# EAGLE board both (EAGLE 9.6.2)
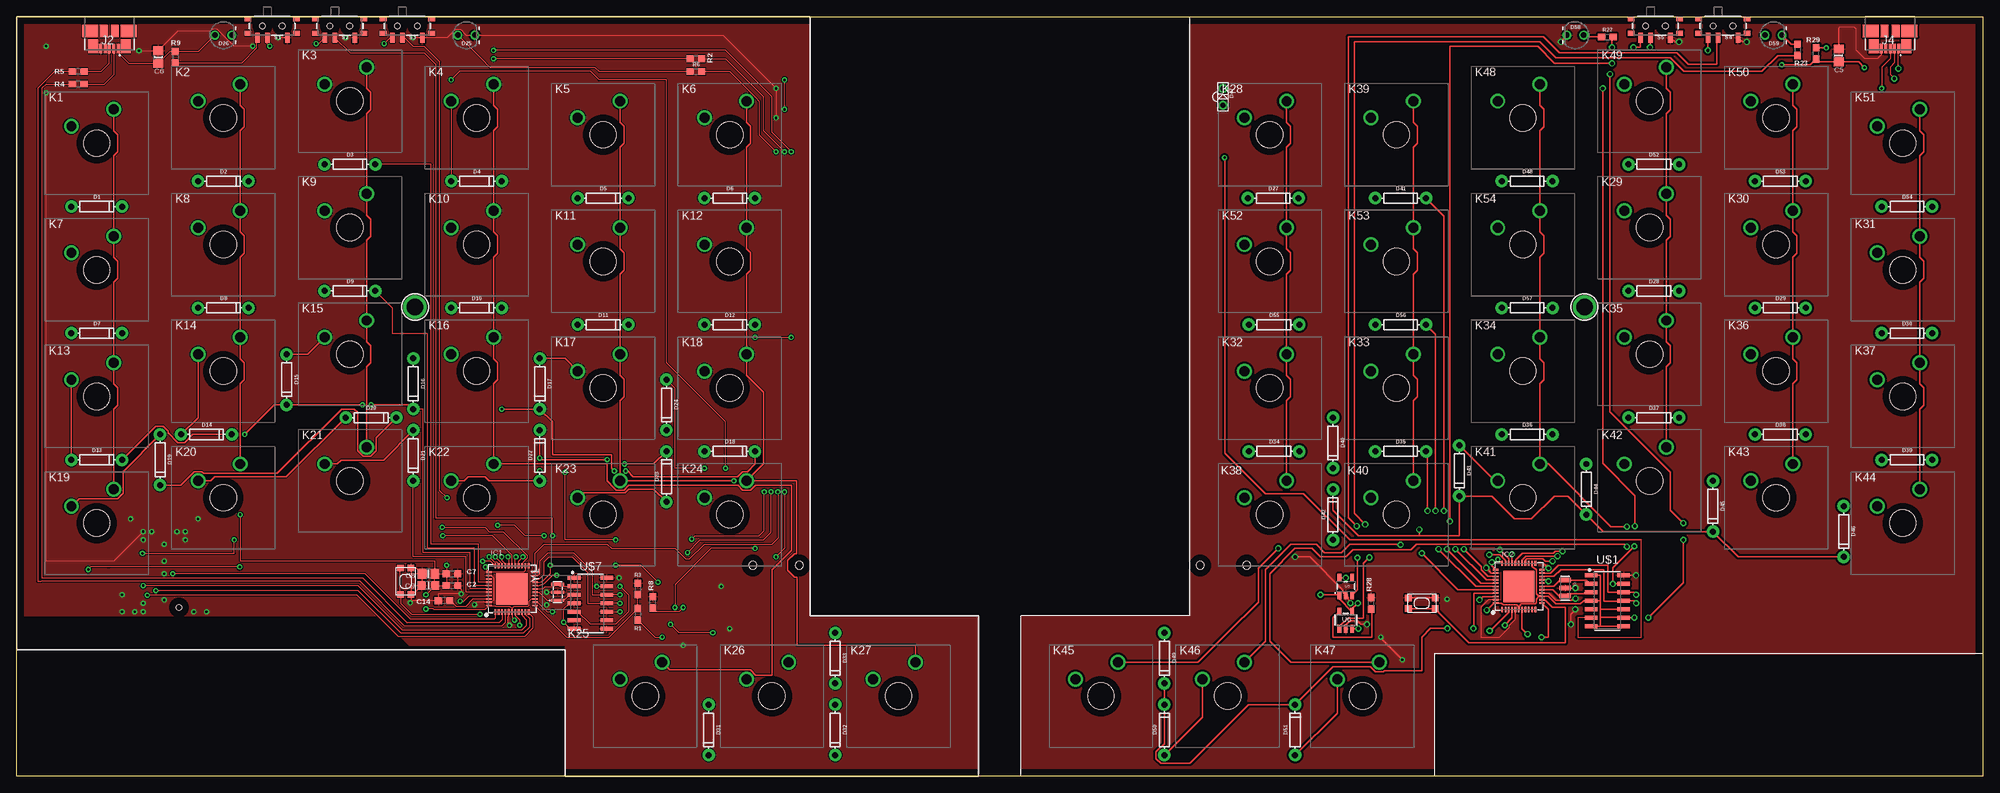
[diagram p0: board, top side]
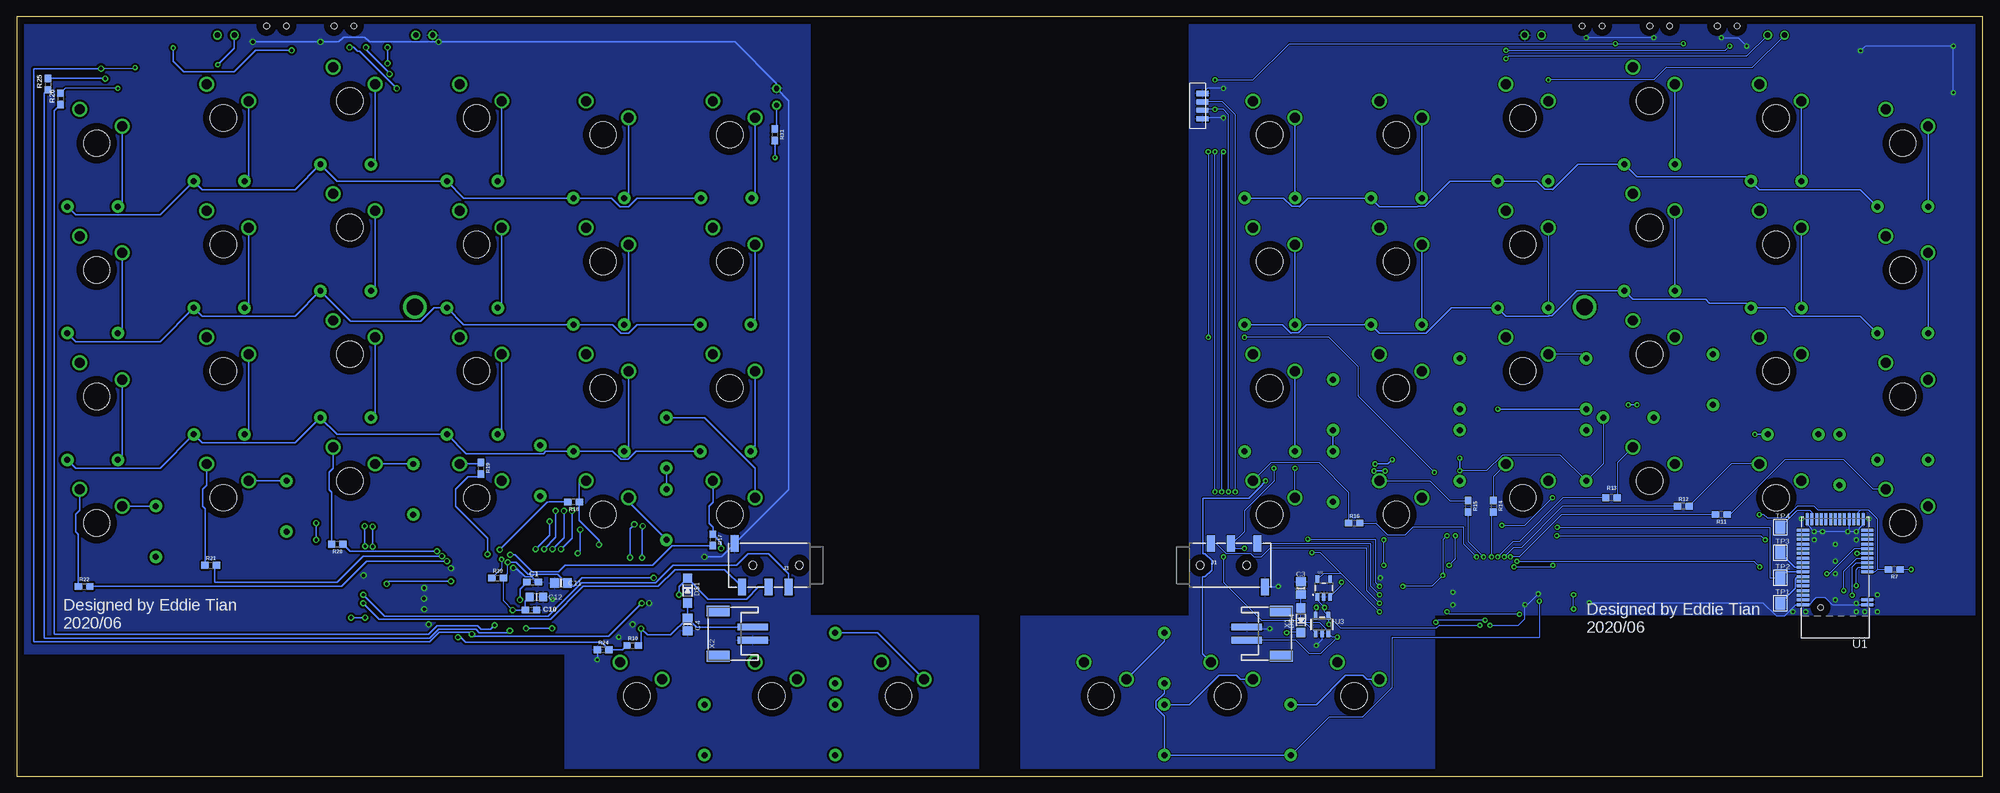
[diagram p1: board, bottom side, seen from below]

Size 295.91 x 114.3 mm. Coordinates in mm from the lower left corner, seen from the top.
Outline: 0,114.3 295.91,114.3 295.91,0 0,0 0,114.3
Copper layers (1*16): Top 0.035mm / dielectric 1.5mm / Bottom 0.035mm
Design rules "default": minimum track width 6mil, minimum drill 0.35mm, track to track 6mil, track to pad 6mil, pad to pad 6mil, via to via 6mil, smd to smd 6mil, copper to edge 40mil, drill to drill 6mil, minimum pad ring 10mil, minimum via ring 8mil, stop-mask expansion 4mil, vias tented up to drill 0mil, thermal gap 10mil

## Footprints (pad centres in the part's own frame; a part is rotated, then mirrored left to right if it is on the bottom)
0603-NO = smd 1.1 x 1: 1 -0.85,0; 2 0.85,0
0805-NO = smd 1.3 x 1.5: 1 -0.95,0; 2 0.95,0
_0805MP = smd 1.2 x 1.3: 1 -1.016,0; 2 1.016,0
DIODE-1N4148 = drill 0.9 pad 1.88: A -3.81,0; C 3.81,0
LED_3MM-NS = drill 0.813: A -1.27,0; K 1.27,0
LTE-302 = drill 0.8: A 1.27,0; C -1.27,0
SOD-123 = smd 1.4 x 1.4: A 1.85,0; C -1.85,0
TQFN44_7MM = smd 0.25 x 0.8: 1 -2.5,-3.475; 2 -2,-3.475; 3 -1.5,-3.475; 4 -1,-3.475; 5 -0.5,-3.475; 6 0,-3.475; 7 0.5,-3.475; 8 1,-3.475; 9 1.5,-3.475; 10 2,-3.475; 11 2.5,-3.475; 23 2.5,3.475; 24 2,3.475; 25 1.5,3.475; 26 1,3.475; 27 0.5,3.475; 28 0,3.475; 29 -0.5,3.475; 30 -1,3.475; 31 -1.5,3.475; 32 -2,3.475; 33 -2.5,3.475 | smd 0.8 x 0.25: 12 3.475,-2.5; 13 3.475,-2; 14 3.475,-1.5; 15 3.475,-1; 16 3.475,-0.5; 17 3.475,0; 18 3.475,0.5; 19 3.475,1; 20 3.475,1.5; 21 3.475,2; 22 3.475,2.5; 34 -3.475,2.5; 35 -3.475,2; 36 -3.475,1.5; 37 -3.475,1; 38 -3.475,0.5; 39 -3.475,0; 40 -3.475,-0.5; 41 -3.475,-1; 42 -3.475,-1.5; 43 -3.475,-2; 44 -3.475,-2.5 | smd 4.7 x 4.7: THERMAL 0,0
AUDIO_JACK_3.5MM_TRRS_SMD_RA = smd 1.2 x 2.5: EARTH 11.3,-3.25; RING1 6.2,3.25; RING2 3.2,3.25; TIP 10.2,3.25 | hole 1.2: 1.6,0; 8.6,0
47346-0001 = smd 0.45 x 1.38: 1 1.3,-4.81; 2 0.65,-4.81; 3 0,-4.81; 4 -0.65,-4.81; 5 -1.3,-4.81 | smd 1.475 x 2.1: 6 -2.453,-4.45; 7 2.453,-4.45 | smd 1.175 x 1.9: 8 0.838,-2.15; 9 -0.838,-2.15 | smd 2.375 x 1.9: 10 2.913,-2.15; 11 -2.913,-2.15
MXSWITCHPLATE = drill 1.499: P$1 -3.81,2.54; P$2 2.54,5.08 | hole 3.988: 0,0
0603 = smd 1.1 x 1: 1 -0.85,0; 2 0.85,0
SWITCH_SPST_SMD_A = smd 0.7 x 1.5: 1 -2.25,-1.75; 2 -0.75,-1.75; 3 2.25,-1.75 | smd 1 x 0.6: GND1 -3.65,1; GND3 3.65,1 | smd 1 x 0.8: GND2 -3.65,-1.1; GND4 3.65,-1.1 | hole 0.9: -1.5,0; 1.5,0
KMR2 = smd 1 x 1: 1 2,0.8; 2 2,-0.8; 3 -2,0.8; 4 -2,-0.8
PAD-1.5X2.0 = smd 1.5 x 2: P$1 0,0
BLE_MODULE_RAYTAC_MDBT40 = smd 1.85 x 0.45: 1 -4.825,4; 2 -4.825,3.3; 3 -4.825,-0.9; 4 -4.825,-1.6; 5 -4.825,-2.3; 6 -4.825,-3; 7 -4.825,-3.7; 8 -4.825,-4.4; 9 -4.825,-5.1; 10 -4.825,-5.8; 11 -4.825,-6.5; 12 -4.825,-7.2; 26 4.825,-7.2; 27 4.825,-6.5; 28 4.825,-5.8; 29 4.825,-5.1; 30 4.825,-4.4; 31 4.825,-3.7; 32 4.825,-3; 33 4.825,-2.3; 34 4.825,-1.6; 35 4.825,-0.9; 36 4.825,-0.2; 37 4.825,0.5; 38 4.825,1.2; 39 4.825,1.9; 40 4.825,2.6; 41 4.825,3.3; 42 4.825,4 | smd 0.45 x 1.85: 13 -4.2,-8.825; 14 -3.5,-8.825; 15 -2.8,-8.825; 16 -2.1,-8.825; 17 -1.4,-8.825; 18 -0.7,-8.825; 19 0,-8.825; 20 0.7,-8.825; 21 1.4,-8.825; 22 2.1,-8.825; 23 2.8,-8.825; 24 3.5,-8.825; 25 4.2,-8.825 | hole 0.9: 2.2,4.45
SOT23-5 = smd 0.55 x 1.2: 1 -0.95,-1.3; 2 0,-1.3; 3 0.95,-1.3; 4 0.95,1.3; 5 -0.95,1.3
TSOP75456 = smd 0.8 x 1.8: $GND 1.905,-0.762; GND -1.905,-0.762; OUT 0.635,-0.762; VCC -0.635,-0.762
SOIC127P600X175-14N = smd 1.901 x 0.599: 1 -2.455,3.81; 2 -2.455,2.54; 3 -2.455,1.27; 4 -2.455,0; 5 -2.455,-1.27; 6 -2.455,-2.54; 7 -2.455,-3.81; 8 2.455,-3.81; 9 2.455,-2.54; 10 2.455,-1.27; 11 2.455,0; 12 2.455,1.27; 13 2.455,2.54; 14 2.455,3.81
MOUNTINGHOLE_2.5_PLATED = drill 2.5 pad 3.2: P$1 0,0
JSTPH2 = smd 1 x 4.6: 1 -1,-3.7; 2 1,-3.7 | smd 1.6 x 3.4: NC1 -3.4,1.5; NC2 3.4,1.5
CSTNE10M0G55Z000R0 = smd 0.4 x 1.9: 1 1.2,0; 2 0,0; 3 -1.2,0
RESONATOR-SMD = smd 0.7 x 1.7: 1 -1.2,0; 2 0,0; 3 1.2,0

## Placement (x,y rotation side)
C1  1uF  [0603-NO]  218.25,29.21 0 bottom
C2  1uF  [0603-NO]  65.53,28.7 0 top
C3  10µF  [0805-NO]  102.62,28.32 90 bottom
C4  10µF  [0805-NO]  194.95,22.86 270 bottom
C5  10µF  [0805-NO]  274.19,108.46 90 top
C6  10µF  [0805-NO]  21.34,108.2 90 top
C7  1uF  [0603-NO]  65.53,30.48 0 top
C8  10µF  [0805-NO]  61.98,30.48 180 top
C9  10uF  [_0805MP]  61.98,28.7 180 top
C10  1uF  [0603-NO]  218.5,25.02 0 bottom
C11  10µF  [0805-NO]  214,29.08 180 bottom
C12  10uF  [_0805MP]  217.68,26.99 0 bottom
C14  1uF  [0603-NO]  64.33,26.42 180 top
D1  200mA/100V/1V  [DIODE-1N4148]  12.06,85.72 0 top
D2  200mA/100V/1V  [DIODE-1N4148]  31.12,89.54 0 top
D3  200mA/100V/1V  [DIODE-1N4148]  50.17,92.08 0 top
D4  200mA/100V/1V  [DIODE-1N4148]  69.22,89.54 0 top
D5  200mA/100V/1V  [DIODE-1N4148]  88.27,87 0 top
D6  200mA/100V/1V  [DIODE-1N4148]  107.32,87 0 top
D7  200mA/100V/1V  [DIODE-1N4148]  12.06,66.67 0 top
D8  200mA/100V/1V  [DIODE-1N4148]  31.12,70.48 0 top
D9  200mA/100V/1V  [DIODE-1N4148]  50.17,73.03 0 top
D10  200mA/100V/1V  [DIODE-1N4148]  69.22,70.48 0 top
D11  200mA/100V/1V  [DIODE-1N4148]  88.27,67.95 0 top
D12  200mA/100V/1V  [DIODE-1N4148]  107.32,67.95 0 top
D13  200mA/100V/1V  [DIODE-1N4148]  12.06,47.62 0 top
D14  200mA/100V/1V  [DIODE-1N4148]  28.58,51.44 0 top
D15  200mA/100V/1V  [DIODE-1N4148]  40.64,59.69 270 top
D16  200mA/100V/1V  [DIODE-1N4148]  59.69,59.06 270 top
D17  200mA/100V/1V  [DIODE-1N4148]  78.74,59.06 270 top
D18  200mA/100V/1V  [DIODE-1N4148]  107.32,48.89 0 top
D19  200mA/100V/1V  [DIODE-1N4148]  21.59,47.62 270 top
D20  200mA/100V/1V  [DIODE-1N4148]  53.34,53.98 0 top
D21  200mA/100V/1V  [DIODE-1N4148]  59.69,48.26 270 top
D22  200mA/100V/1V  [DIODE-1N4148]  78.74,48.26 90 top
D23  200mA/100V/1V  [DIODE-1N4148]  97.79,45.09 90 top
D24  200mA/100V/1V  [DIODE-1N4148]  97.79,55.88 270 top
D25  [LED_3MM-NS]  67.69,111.51 0 top
D26  [LED_3MM-NS]  31.12,111.51 0 top
D27  200mA/100V/1V  [DIODE-1N4148]  189.1,87 0 top
D28  200mA/100V/1V  [DIODE-1N4148]  246.38,73.03 0 top
D29  200mA/100V/1V  [DIODE-1N4148]  265.43,70.48 0 top
D30  200mA/100V/1V  [DIODE-1N4148]  284.48,66.67 0 top
D31  200mA/100V/1V  [DIODE-1N4148]  104.14,6.98 270 top
D32  200mA/100V/1V  [DIODE-1N4148]  123.19,6.98 270 top
D33  200mA/100V/1V  [DIODE-1N4148]  123.19,17.78 270 top
D34  200mA/100V/1V  [DIODE-1N4148]  189.23,48.89 0 top
D35  200mA/100V/1V  [DIODE-1N4148]  208.28,48.89 0 top
D36  200mA/100V/1V  [DIODE-1N4148]  227.33,51.44 0 top
D37  200mA/100V/1V  [DIODE-1N4148]  246.38,53.98 0 top
D38  200mA/100V/1V  [DIODE-1N4148]  265.43,51.44 0 top
D39  200mA/100V/1V  [DIODE-1N4148]  284.48,47.62 0 top
D40  200mA/100V/1V  [DIODE-1N4148]  198.12,50.17 270 top
D41  200mA/100V/1V  [DIODE-1N4148]  208.28,87 0 top
D42  200mA/100V/1V  [DIODE-1N4148]  198.12,39.37 90 top
D43  200mA/100V/1V  [DIODE-1N4148]  217.11,45.97 270 top
D44  200mA/100V/1V  [DIODE-1N4148]  236.22,43.18 270 top
D45  200mA/100V/1V  [DIODE-1N4148]  255.27,40.64 270 top
D46  200mA/100V/1V  [DIODE-1N4148]  274.96,36.83 270 top
D47  LED-IRSIDE_EMITTER  [LTE-302]  181.55,102.23 270 top
D48  200mA/100V/1V  [DIODE-1N4148]  227.33,89.54 0 top
D49  200mA/100V/1V  [DIODE-1N4148]  172.72,17.78 270 top
D50  200mA/100V/1V  [DIODE-1N4148]  172.72,6.98 90 top
D51  200mA/100V/1V  [DIODE-1N4148]  192.41,6.98 90 top
D52  200mA/100V/1V  [DIODE-1N4148]  246.38,92.08 0 top
D53  200mA/100V/1V  [DIODE-1N4148]  265.43,89.54 0 top
D54  200mA/100V/1V  [DIODE-1N4148]  284.48,85.72 0 top
D55  200mA/100V/1V  [DIODE-1N4148]  189.23,67.95 0 top
D56  200mA/100V/1V  [DIODE-1N4148]  208.28,67.95 0 top
D57  200mA/100V/1V  [DIODE-1N4148]  227.33,70.48 0 top
D58  [LED_3MM-NS]  234.57,111.51 180 top
D59  [LED_3MM-NS]  264.41,111.51 0 top
D$1  MBR120  [SOD-123]  194.95,27.94 270 bottom
D$4  MBR120  [SOD-123]  102.62,23.5 90 bottom
IC1  ATMEGA32U4-MU  [TQFN44_7MM]  74.55,28.19 0 top
IC2  ATMEGA32U4-MU  [TQFN44_7MM]  226.06,28.58 0 top
J1  AUDIO_JACK_TRRSSMD_RA  [AUDIO_JACK_3.5MM_TRRS_SMD_RA]  119.38,31.75 0 bottom
J2  47346-0001  [47346-0001]  13.97,114.3 0 top
J3  AUDIO_JACK_TRRSSMD_RA  [AUDIO_JACK_3.5MM_TRRS_SMD_RA]  176.53,31.75 180 bottom
J4  47346-0001  [47346-0001]  281.94,114.3 0 top
K1  MXSWITCHPLATE  [MXSWITCHPLATE]  12.06,95.25 0 top
K2  MXSWITCHPLATE  [MXSWITCHPLATE]  31.12,99.06 0 top
K3  MXSWITCHPLATE  [MXSWITCHPLATE]  50.17,101.6 0 top
K4  MXSWITCHPLATE  [MXSWITCHPLATE]  69.22,99.06 0 top
K5  MXSWITCHPLATE  [MXSWITCHPLATE]  88.27,96.52 0 top
K6  MXSWITCHPLATE  [MXSWITCHPLATE]  107.32,96.52 0 top
K7  MXSWITCHPLATE  [MXSWITCHPLATE]  12.06,76.2 0 top
K8  MXSWITCHPLATE  [MXSWITCHPLATE]  31.12,80.01 0 top
K9  MXSWITCHPLATE  [MXSWITCHPLATE]  50.17,82.55 0 top
K10  MXSWITCHPLATE  [MXSWITCHPLATE]  69.22,80.01 0 top
K11  MXSWITCHPLATE  [MXSWITCHPLATE]  88.27,77.47 0 top
K12  MXSWITCHPLATE  [MXSWITCHPLATE]  107.32,77.47 0 top
K13  MXSWITCHPLATE  [MXSWITCHPLATE]  12.06,57.15 0 top
K14  MXSWITCHPLATE  [MXSWITCHPLATE]  31.12,60.96 0 top
K15  MXSWITCHPLATE  [MXSWITCHPLATE]  50.17,63.5 0 top
K16  MXSWITCHPLATE  [MXSWITCHPLATE]  69.22,60.96 0 top
K17  MXSWITCHPLATE  [MXSWITCHPLATE]  88.27,58.42 0 top
K18  MXSWITCHPLATE  [MXSWITCHPLATE]  107.32,58.42 0 top
K19  MXSWITCHPLATE  [MXSWITCHPLATE]  12.06,38.1 0 top
K20  MXSWITCHPLATE  [MXSWITCHPLATE]  31.12,41.91 0 top
K21  MXSWITCHPLATE  [MXSWITCHPLATE]  50.17,44.45 0 top
K22  MXSWITCHPLATE  [MXSWITCHPLATE]  69.22,41.91 0 top
K23  MXSWITCHPLATE  [MXSWITCHPLATE]  88.27,39.37 0 top
K24  MXSWITCHPLATE  [MXSWITCHPLATE]  107.32,39.37 0 top
K25  MXSWITCHPLATE  [MXSWITCHPLATE]  94.62,12.07 0 top
K26  MXSWITCHPLATE  [MXSWITCHPLATE]  113.67,12.07 0 top
K27  MXSWITCHPLATE  [MXSWITCHPLATE]  132.72,12.07 0 top
K28  MXSWITCHPLATE  [MXSWITCHPLATE]  188.6,96.52 0 top
K29  MXSWITCHPLATE  [MXSWITCHPLATE]  245.75,82.55 0 top
K30  MXSWITCHPLATE  [MXSWITCHPLATE]  264.8,80.01 0 top
K31  MXSWITCHPLATE  [MXSWITCHPLATE]  283.85,76.2 0 top
K32  MXSWITCHPLATE  [MXSWITCHPLATE]  188.6,58.42 0 top
K33  MXSWITCHPLATE  [MXSWITCHPLATE]  207.65,58.42 0 top
K34  MXSWITCHPLATE  [MXSWITCHPLATE]  226.69,60.96 0 top
K35  MXSWITCHPLATE  [MXSWITCHPLATE]  245.75,63.5 0 top
K36  MXSWITCHPLATE  [MXSWITCHPLATE]  264.8,60.96 0 top
K37  MXSWITCHPLATE  [MXSWITCHPLATE]  283.85,57.15 0 top
K38  MXSWITCHPLATE  [MXSWITCHPLATE]  188.6,39.37 0 top
K39  MXSWITCHPLATE  [MXSWITCHPLATE]  207.65,96.52 0 top
K40  MXSWITCHPLATE  [MXSWITCHPLATE]  207.65,39.37 0 top
K41  MXSWITCHPLATE  [MXSWITCHPLATE]  226.69,41.91 0 top
K42  MXSWITCHPLATE  [MXSWITCHPLATE]  245.75,44.45 0 top
K43  MXSWITCHPLATE  [MXSWITCHPLATE]  264.8,41.91 0 top
K44  MXSWITCHPLATE  [MXSWITCHPLATE]  283.85,38.1 0 top
K45  MXSWITCHPLATE  [MXSWITCHPLATE]  163.2,12.07 0 top
K46  MXSWITCHPLATE  [MXSWITCHPLATE]  182.25,12.07 0 top
K47  MXSWITCHPLATE  [MXSWITCHPLATE]  202.56,12.07 0 top
K48  MXSWITCHPLATE  [MXSWITCHPLATE]  226.69,99.06 0 top
K49  MXSWITCHPLATE  [MXSWITCHPLATE]  245.75,101.6 0 top
K50  MXSWITCHPLATE  [MXSWITCHPLATE]  264.8,99.06 0 top
K51  MXSWITCHPLATE  [MXSWITCHPLATE]  283.85,95.25 0 top
K52  MXSWITCHPLATE  [MXSWITCHPLATE]  188.6,77.47 0 top
K53  MXSWITCHPLATE  [MXSWITCHPLATE]  207.65,77.47 0 top
K54  MXSWITCHPLATE  [MXSWITCHPLATE]  226.69,80.01 0 top
R1  100k  [0603]  93.47,24.38 270 top
R2  1K  [0603-NO]  102.24,107.95 0 top
R3  100k  [0603]  93.47,28.19 270 top
R4  22  [0603-NO]  9.27,104.14 180 top
R5  22  [0603-NO]  9.27,106.05 180 top
R6  2.2k  [0603]  102.24,106.05 0 top
R7  100k  [0603]  13.34,31.12 180 bottom
R8  10K\  [0603-NO]  95.76,26.16 90 top
R9  100K  [0603-NO]  23.88,108.2 270 top
R10  100k  [0603]  203.2,19.69 0 bottom
R11  100k  [0603]  39.37,39.37 180 bottom
R12  100k  [0603]  45.09,40.64 180 bottom
R13  100k  [0603]  55.88,41.91 180 bottom
R14  100k  [0603]  73.66,40.64 270 bottom
R15  100k  [0603]  77.47,40.64 270 bottom
R16  100k  [0603]  94.62,38.1 0 bottom
R17  100k  [0603]  191.14,35.56 270 bottom
R18  100k  [0603]  212.09,41.28 180 bottom
R19  100k  [0603]  226.06,46.36 270 bottom
R20  100k  [0603]  247.65,34.92 0 bottom
R21  100k  [0603]  266.7,31.75 0 bottom
R22  100k  [0603]  285.75,28.58 0 bottom
R23  1K  [0603-NO]  268.03,109.28 270 top
R24  100k  [0603]  207.65,19.05 0 bottom
R25  22  [0603-NO]  291.21,104.14 270 bottom
R26  22  [0603-NO]  289.31,101.92 270 bottom
R27  2.2k  [0603]  239.4,111.25 0 top
R28  10K\  [0603-NO]  203.84,26.04 90 top
R29  100K  [0603-NO]  270.83,108.78 90 top
R30  100k  [0603]  223.52,29.84 0 bottom
R31  470  [0603]  181.8,96.52 270 bottom
S1  Power  [SWITCH_SPST_SMD_A]  38.48,112.9 0 top
S2  bt_mode  [SWITCH_SPST_SMD_A]  48.64,112.9 0 top
S3  irmode  [SWITCH_SPST_SMD_A]  58.8,112.9 0 top
S4  Power  [SWITCH_SPST_SMD_A]  256.79,112.9 0 top
S5  irmode  [SWITCH_SPST_SMD_A]  246.63,112.9 0 top
SW1  SPST_TACT-KMR2  [KMR2]  58.55,29.34 90 top
SW2  SPST_TACT-KMR2  [KMR2]  211.46,26.04 180 top
TP1  SWCLK  [PAD-1.5X2.0]  30.48,26.04 0 bottom
TP2  SWDIO  [PAD-1.5X2.0]  30.48,29.84 0 bottom
TP3  SWDIO  [PAD-1.5X2.0]  30.48,33.66 0 bottom
TP4  DFU  [PAD-1.5X2.0]  30.48,37.47 0 bottom
U1  MBT40  [BLE_MODULE_RAYTAC_MDBT40]  22.23,29.84 180 bottom
U2  3.3V  [SOT23-5]  99.19,28.32 0 bottom
U3  MCP73831  [SOT23-5]  99.44,22.86 0 bottom
U4  TSOP75456  [TSOP75456]  118.24,100.84 90 bottom
U5  3.3V  [SOT23-5]  200.03,28.58 0 top
U6  MCP73831T-2ACI/OT  [SOT23-5]  200.03,23.5 0 top
U$1  MCP2120SOIC14  [SOIC127P600X175-14N]  239.4,26.42 0 top
U$2  MOUNTINGHOLE2.5  [MOUNTINGHOLE_2.5_PLATED]  235.97,70.61 0 top
U$7  MCP2120  [SOIC127P600X175-14N]  86.36,26.04 0 top
U$11  MOUNTINGHOLE2.5  [MOUNTINGHOLE_2.5_PLATED]  59.94,70.61 0 top
X1  JSTPH  [JSTPH2]  107.06,21.46 270 bottom
X2  JSTPH  [JSTPH2]  188.85,21.46 90 bottom
Y1  CSTNE10M0G55Z000R0  [CSTNE10M0G55Z000R0]  81.41,27.69 270 top
Y2  8MHz  [RESONATOR-SMD]  233.05,28.32 270 top

## Library data of the parts
C1-C12 C14 D$1 D$4 IC1 IC2 R2 R4 R5 R8 R9 R23 R25 R26 R28 R29 TP1-TP4 U1 U3 U6 X1 X2 = microbuilder
D1-D24 D27-D46 D48-D57 = SparkFun-DiscreteSemi; PROD_ID: DIO-08378
D25 D26 D58 D59 = SparkFun-LED
D47 = SparkFun-LED; PROD_ID: DIO-10904; SF_ID: SEN-00241
J1 J3 = SparkFun-Connectors; PROD_ID: CONN-10676; SF_ID: PRT-12639
J2 J4 = SamacSys_Parts; DESCRIPTION: Micro USB B Receptacle Bottom Mount Assy Molex Right Angle SMT Type B Version 2.0 Micro USB Connector Socket, 30 V ac, 1A 47352 MICRO-USB; HEIGHT: mm; MANUFACTURER_NAME: Molex; MANUFACTURER_PART_NUMBER: 47346-0001; MOUSER_PART_NUMBER: 538-47346-0001; MOUSER_PRICE-STOCK: https://www.mouser.co.uk/ProductDetail/Molex/47346-0001?qs=c2CV6XM0DweJBWaSeyWeCw%3D%3D
K1-K54 U4 U$1 U$7 = Kb parts
R1 R3 R7 R10-R22 R24 R30 = SparkFun-Resistors; PROD_ID: RES-07828
R6 R27 = SparkFun-Resistors; PROD_ID: RES-08272
R31 = SparkFun-Resistors; PROD_ID: RES-07869
S1-S5 = SparkFun-Switches; PROD_ID: SWCH-10651; SF_SKU: COM-10860
SW1 SW2 = adafruit
U2 U5 = SparkFun-IC-Power; PROD_ID: VREG-12457
U$2 U$11 = microbuilder; BOM: EXCLUDE
Y1 = SamacSys_Parts; DESCRIPTION: Piezoelectric Ceramic Resonator 10.0000MHZ 33PF SMD Wide temperature range; HEIGHT: 0.8mm; MANUFACTURER_NAME: Murata Electronics; MANUFACTURER_PART_NUMBER: CSTNE10M0G55Z000R0; MOUSER_PART_NUMBER: 81-CSTNE10M0G55Z000R; MOUSER_PRICE-STOCK: https://www.mouser.com/Search/Refine.aspx?Keyword=81-CSTNE10M0G55Z000R
Y2 = SparkFun

## Nets
4_SWDIO/RST: IC1.25 TP2.P$1 U1.35
7_BLE_IRQ: IC1.1 U1.8
8_BLE_CS: IC1.28 U1.7
+3V1: C10.1 C11.1 C12.1 IC2.6 IC2.14 IC2.24 IC2.34 IC2.44 R30.2 S5.1 U5.5 U$1.1 U$1.4 U$1.7 U$1.8 U$1.9 U$1.10
+3V3: C2.1 C7.1 C8.1 C9.1 IC1.6 IC1.14 IC1.24 IC1.34 IC1.44 R7.2 S2.1 S3.1 U1.3 U1.14 U2.5 U4.VCC U$7.1 U$7.4 U$7.7 U$7.8 U$7.9 U$7.10
AREF: C14.1 IC1.42
AREF1: C1.1 IC2.42
BATLEV: IC1.12 R1.1 R3.2
BATLEV1: IC2.12 R10.1 R24.2
BLINKY: IC1.22 R6.2
BLINKY1: IC2.36 R27.2
COL0: IC1.26 R16.2
COL1: IC1.27 R15.2
COL2: IC1.29 R14.2
COL3: IC1.30 R13.2
COL4: IC1.31 R12.2
COL5: IC1.32 R11.2
COL6: IC2.26 R22.2
COL7: IC2.27 R21.2
COL8: IC2.29 R20.2
COL9: IC2.30 R19.2
COL10: IC2.31 R18.2
COL11: IC2.32 R17.2
D+: IC1.4 R5.2
D+1: IC2.4 R26.2
D-: IC1.3 R4.2
D-1: IC2.3 R25.2
DCC: U1.15
DEC2: U1.41
DFU: TP4.P$1 U1.24
FCTRYRST: TP3.P$1 U1.34
GND: C2.2 C3.2 C6.2 C7.2 C8.2 C9.2 C14.2 D25.K IC1.5 IC1.15 IC1.23 IC1.35 IC1.43 J1.EARTH J2.5 R3.1 R8.2 S1.3 S2.3 S3.3 SW1.2 SW1.4 U1.1 U1.2 U1.13 U1.16 U1.25 U1.42 U2.2 U3.2 U4.$GND U4.GND U$7.14 X1.1 Y1.2
GND1: C1.2 C4.2 C5.2 C10.2 C11.2 C12.2 D47.C D58.K IC2.5 IC2.15 IC2.23 IC2.35 IC2.43 J3.EARTH J4.5 R24.1 R28.2 S4.3 S5.3 SW2.2 SW2.4 U5.2 U6.2 U$1.14 X2.1 Y2.2
MISO: IC1.11 U1.5
MODE: IC1.18 S2.2 U$7.13
MOSI: IC1.10 U1.6
N$1: D26.K R2.1
N$2: IC1.33 R7.1
N$3: R2.2 U3.1
N$4: R8.1 U3.5
N$5: D25.A R6.1
N$6: J2.3 R5.1
N$7: K1.P$2 K7.P$2 K13.P$2 K19.P$2 R11.1
N$8: K2.P$2 K8.P$2 K14.P$2 K20.P$2 R12.1
N$9: K3.P$2 K9.P$2 K15.P$2 K21.P$2 R13.1
N$10: K4.P$2 K10.P$2 K16.P$2 K22.P$2 K25.P$2 R14.1
N$11: R9.2 S1.1
N$12: S1.2 U2.3
N$13: K5.P$2 K11.P$2 K17.P$2 K23.P$2 K26.P$2 R15.1
N$14: K6.P$2 K12.P$2 K18.P$2 K24.P$2 K27.P$2 R16.1
N$15: J4.2 R25.1
N$16: J2.2 R4.1
N$17: R23.2 U6.1
N$18: R28.1 U6.5
N$19: K28.P$2 K32.P$2 K38.P$2 K45.P$2 K52.P$2 R17.1
N$20: K33.P$2 K39.P$2 K40.P$2 K46.P$2 K53.P$2 R18.1
N$21: K34.P$2 K41.P$2 K47.P$2 K48.P$2 K54.P$2 R19.1
N$22: K29.P$2 K35.P$2 K42.P$2 K49.P$2 R20.1
N$23: D1.A K1.P$1
N$24: D2.A K2.P$1
N$25: D3.A K3.P$1
N$26: D4.A K4.P$1
N$27: D5.A K5.P$1
N$28: D6.A K6.P$1
N$29: D12.A K12.P$1
N$30: D11.A K11.P$1
N$31: D10.A K10.P$1
N$32: D9.A K9.P$1
N$33: D8.A K8.P$1
N$34: D7.A K7.P$1
N$35: D13.A K13.P$1
N$36: D14.A K14.P$1
N$37: D15.A K15.P$1
N$38: D16.A K16.P$1
N$39: D17.A K17.P$1
N$40: D18.A K18.P$1
N$41: D24.A K24.P$1
N$42: D23.A K23.P$1
N$43: D22.A K22.P$1
N$44: D21.A K21.P$1
N$45: D20.A K20.P$1
N$46: D19.A K19.P$1
N$47: K30.P$2 K36.P$2 K43.P$2 K50.P$2 R21.1
N$48: K31.P$2 K37.P$2 K44.P$2 K51.P$2 R22.1
N$49: D27.A K28.P$1
N$50: D41.A K39.P$1
N$51: D48.A K48.P$1
N$52: D52.A K49.P$1
N$53: D33.A K27.P$1
N$54: D32.A K26.P$1
N$55: D31.A K25.P$1
N$56: D53.A K50.P$1
N$57: D54.A K51.P$1
N$58: D30.A K31.P$1
N$59: D29.A K30.P$1
N$60: D28.A K29.P$1
N$61: D57.A K54.P$1
N$62: D56.A K53.P$1
N$63: D55.A K52.P$1
N$64: U4.OUT U$7.5
N$65: U$7.6
N$66: D34.A K32.P$1
N$67: D35.A K33.P$1
N$68: D36.A K34.P$1
N$69: D37.A K35.P$1
N$70: D38.A K36.P$1
N$71: D39.A K37.P$1
N$72: D46.A K44.P$1
N$73: D45.A K43.P$1
N$74: D44.A K42.P$1
N$75: D43.A K41.P$1
N$76: D42.A K40.P$1
N$77: D40.A K38.P$1
N$78: D51.A K47.P$1
N$79: D50.A K46.P$1
N$80: D49.A K45.P$1
N$81: S4.2 U5.3
N$82: R29.2 S4.1
N$83: D58.A R27.1
N$84: D59.K R23.1
N$85: IC2.33 R30.1
N$86: D47.A R31.1
N$87: R31.2 U$1.6
N$88: J4.3 R26.1
ROW0: D1.C D2.C D3.C D4.C D5.C D6.C IC1.37
ROW1: D7.C D8.C D9.C D10.C D11.C D12.C IC1.38
ROW2: D13.C D14.C D15.C D16.C D17.C D18.C IC1.39
ROW3: D19.C D20.C D21.C D22.C D23.C D24.C IC1.40
ROW4: D31.C D32.C D33.C IC1.41
ROW5: D27.C D41.C D48.C D52.C D53.C D54.C IC2.37
ROW6: D40.C D42.C D43.C D44.C D45.C D46.C IC2.40
ROW7: D34.C D35.C D36.C D37.C D38.C D39.C IC2.39
ROW8: D28.C D29.C D30.C D55.C D56.C D57.C IC2.38
ROW9: D49.C D50.C D51.C IC2.41
RST: IC1.13 SW1.1 SW1.3
RST1: IC2.13 SW2.1 SW2.3
RX: IC1.20 J1.RING2 U$7.11
RX1: IC2.20 J3.TIP U$1.11
SCK: IC1.9 U1.4
SIG_MODE: IC1.19 S3.2
SIG_MODE1: IC2.19 S5.2 U$1.13
SS: IC1.8
SWCLK: TP1.P$1 U1.36
TX: IC1.21 J1.TIP U$7.12
TX1: IC2.21 J3.RING2 U$1.12
VBAT: C3.1 D$4.A R1.2 U3.3 X1.2
VBAT1: C4.1 D$1.A R10.2 U6.3 X2.2
VBUS: C6.1 D26.A D$4.C IC1.7 J1.RING1 J2.1 R9.1 U2.1 U3.4
VBUS1: C5.1 D59.A D$1.C IC2.7 J3.RING1 J4.1 R29.1 U5.1 U6.4
XTAL1: IC1.17 U$7.2 Y1.3
XTAL2: IC1.16 U$7.3 Y1.1
XTAL3: IC2.16 U$1.3 Y2.3
XTAL4: IC2.17 U$1.2 Y2.1

## Tracks (layer width: path | path; a pad name or v marks a point on that pad's centre or on a via)
4_SWDIO/RST  (via drill 0.35)
  Top 0.152: IC1.25 76.2,31.82 76.2,32.16 76.33,32.3 76.34,32.3 76.84,32.8 76.84,33.24 73.25,36.83 71.12,36.83 70.49,37.47 v64.07,37.47
  Bottom 0.152: TP2.P$1 32.06,29.84 32.06,37.47 v64.07,37.47
  Bottom 0.254: TP2.P$1 29.58,30.75 U1.35
7_BLE_IRQ  (via drill 0.35)
  Top 0.152: IC1.1 72.05,23.79 71.88,23.62 59.31,23.62 52.45,30.48 v23.5,30.48
  Bottom 0.152: v23.5,30.48 23.11,30.48 19.3,34.29 17.45,34.29 U1.8
8_BLE_CS  (via drill 0.35)
  Top 0.152: IC1.28 74.54,31.68 74.54,33.27 71.62,36.2 v64.14,36.2 | v32.77,35.56 32.77,33.54 v18.94,33.54
  Bottom 0.152: v18.94,33.54 U1.7 | v64.14,36.2 33.4,36.2 v32.77,35.56
+3V1  (via drill 0.5)
  Top 0.254: IC2.14 230.52,27.08 231.65,25.94 235.35,25.94 235.83,26.42 U$1.4 238.32,26.42 | 238.32,22.61 U$1.7 | 238.32,26.42 238.32,25.15 | 238.32,25.15 238.32,23.94 | 238.32,23.94 238.32,22.61 | U$1.8 238.32,22.61 | 238.32,26.42 238.32,30.23 U$1.1 | U$1.10 238.32,25.15 | 238.32,23.94 241.79,23.94 U$1.9 v243.46,23.88 | v221.23,25.02 222.29,26.08 IC2.44 223.47,26.08 223.76,25.78 225.8,25.78 225.97,25.61 225.97,25.19 IC2.6 226.15,25.19 226.15,25.61 226.49,25.95 228.53,25.95 228.69,26.11 228.69,26.65 229.12,27.08 IC2.14 | IC2.14 229.44,27.17 229.02,27.17 228.69,27.5 228.69,31.04 228.53,31.2 228.49,31.2 228.06,31.63 IC2.24 | v200.03,29.84 199.11,29.84 U5.5 | IC2.34 222,31.66 v222,32.2 | S5.1 244.38,109.66 v243.33,109.66 | v250.83,38.1 248.88,40.04 248.88,45.75 239.8,54.83 v239.8,105.64 | v250.83,35.56 250.83,29.15 v245.55,23.88
  Bottom 0.152: v222,32.2 222,30.52 R30.2 222.67,26.46 v221.23,25.02
  Bottom 0.254: C12.1 219.35,26.33 C10.1 v221.23,25.02 | v200.03,29.84 210.82,29.84 212.09,28.58 212.54,28.58 C11.1 213.15,29.08 214.46,30.4 218.93,30.4 220.73,32.2 v222,32.2 | v243.33,109.66 243.33,109.35 239.8,105.81 v239.8,105.64 | v250.83,38.1 v250.83,35.56 | v245.55,23.88 v243.46,23.88
+3V3  (via drill 0.35)
  Top 0.152: v33.66,39.37 33.66,32.41 62.93,32.41 C8.1 | IC1.24 76.55,30.96 76.37,30.77 71.2,30.77 71.12,30.69 IC1.34 70.55,31.22 v70.55,31.5 | 74.55,25.27 IC1.6 74.55,23.88 v74.93,23.5 | 74.55,25.27 74.21,25.62 72.1,25.62 72.03,25.69 IC1.44 70.43,25.05 62.84,25.05 62.71,25.17 v61.6,25.17 | IC1.14 77.49,26.69 77.13,26.33 77.13,25.75 76.91,25.53 74.8,25.53 74.55,25.27 | U$7.7 83.3,22.23 v82.35,23.17 82.35,25.2 83.19,26.04 U$7.4 | C9.1 C2.1 C7.1 | C9.1 62.93,28.77 C8.1 | C8.1 C7.1 | U$7.10 v90.81,24.77 | v100.97,33.66 102.87,35.56 112.4,35.56 113.53,36.7 v113.53,42.81 | v64.71,31.75 64.68,31.73 C7.1 | v115.57,100.33 v115.57,104.78 | v61.6,27.3 C9.1 | v45.09,110.24 45.47,110.24 S2.1 | S3.1 56.23,111.15 v55.31,110.24
  Bottom 0.152: U1.14 18.73,39.7 18.42,40.01 | 18.42,40.01 17.15,40.01 15.88,38.73 15.88,31.12 | 15.88,31.12 16.25,30.75 U1.3 | 18.42,40.01 24.77,40.01 25.4,40.64 27.94,40.64 29.76,38.82 32.39,38.82 32.94,39.37 v33.66,39.37 | v74.93,23.5 82.03,23.5 v82.35,23.17 | v90.81,24.77 96.52,30.48 | 96.52,30.48 99.28,30.48 U2.5 | 96.52,30.48 99.7,33.66 v100.97,33.66 | v113.53,42.81 113.53,99.56 114.3,100.33 v115.57,100.33 117.35,100.33 U4.VCC | v64.71,31.75 64.96,31.5 v70.55,31.5 | v115.57,104.78 109.86,104.78 104.39,110.24 v55.31,110.24 v45.09,110.24 | v61.6,25.17 v61.6,27.3 | R7.2 15.88,31.12
  pour Top: 83.82,30.48 83.82,21.59 88.9,21.59 88.9,30.48
AREF
  Top 0.152: C14.1 65.37,26.42 66.17,25.62 67.63,25.62 68.7,26.69 IC1.42
AREF1  (via drill 0.5)
  Top 0.254: v220.16,26.54 220.66,27.04 222.55,27.04 IC2.42
  Bottom 0.254: v220.16,26.54 220.16,28.16 C1.1
BATLEV
  Top 0.152: R3.2 R1.1 89.19,20.96 82.76,20.96 IC1.12
BATLEV1  (via drill 0.5)
  Top 0.254: IC2.12 230.5,25.11 230.5,20.91 v229.49,20.91
  Bottom 0.254: R10.1 204.69,19.05 R24.2 207.9,20.15 228.35,20.15 229.11,20.91 v229.49,20.91
BLINKY  (via drill 0.35)
  Top 0.152: R6.2 107.32,106.05 111.21,102.16 111.21,102.15 111.76,101.6 111.76,96.52 v114.3,93.98 | v114.55,42.8 114.55,35.81 113.67,34.92 103.51,34.92 101.28,32.7 100.65,32.7 99.06,34.29 89.54,34.29 88.9,34.92 79.38,34.92 78.02,33.57 IC1.22
  Bottom 0.152: v114.3,93.98 114.55,93.73 v114.55,42.8
BLINKY1  (via drill 0.5)
  Top 0.254: v217.81,34.19 220.43,31.56 220.43,31.06 221.42,30.08 IC2.36 | v240.09,107.25 240.03,107.31 231.46,107.31 228.92,109.86 215.71,109.86 v215.71,38.35 | v240.09,109.66 240.09,111.1 R27.2
  Bottom 0.254: v240.09,109.66 v240.09,107.25 | v215.71,38.35 215.71,36.29 v217.81,34.19
COL0  (via drill 0.35)
  Top 0.152: IC1.26 75.55,32.37 v76.2,33.02
  Bottom 0.152: R16.2 91.36,38.1 89.54,36.28 86.99,36.28 85.81,37.47 78.11,37.47 78.11,34.92 v76.2,33.02
COL1  (via drill 0.35)
  Top 0.152: IC1.27 75.05,32.91 v75.16,33.02
  Bottom 0.152: R15.2 77.47,35.33 v75.16,33.02
COL2  (via drill 0.35)
  Top 0.152: v73.93,33.02 74.05,32.91 IC1.29
  Bottom 0.152: R14.2 73.93,39.52 v73.93,33.02
COL3  (via drill 0.35)
  Top 0.152: v73.03,33.02 73.03,32.54 73.55,32.02 IC1.30
  Bottom 0.152: R13.2 63.18,41.91 69.69,35.4 70.64,35.4 v73.03,33.02
COL4  (via drill 0.35)
  Top 0.152: v72.03,33.02 72.75,32.3 72.77,32.3 73.05,32.02 IC1.31
  Bottom 0.152: R12.2 63.27,40.64 69.42,34.49 70.56,34.49 v72.03,33.02
COL5  (via drill 0.35)
  Top 0.152: v71.12,33.02 71.84,32.3 72.27,32.3 72.55,32.02 IC1.32
  Bottom 0.152: v71.12,33.02 69.79,33.02 63.44,39.37 R11.2
COL6  (via drill 0.5)
  Top 0.254: v231.14,32.39 230.04,32.39 229.69,32.73 227.33,32.73 227.32,32.73 227.06,32.47 IC2.26
  Bottom 0.254: v231.14,32.39 243.21,32.39 247.02,28.58 R22.2
COL7  (via drill 0.5)
  Top 0.254: IC2.27 226.56,32.55 227.15,33.14 v231.89,33.14 v231.89,33.13
  Bottom 0.254: v231.89,33.13 243.73,33.13 247.65,29.21 266.06,29.21 266.06,31.54 R21.2
COL8  (via drill 0.5)
  Top 0.254: IC2.29 225.66,32.15 225.66,32.57 226.63,33.54 231.26,33.54 231.59,33.87 v232.64,33.87 v232.65,33.88
  Bottom 0.254: v232.65,33.88 241.98,33.88 242.01,33.84 245.72,33.84 R20.2
COL9  (via drill 0.5)
  Top 0.254: IC2.30 225.06,33.39 v225.04,33.4
  Bottom 0.254: v225.04,33.4 225.04,35.82 229.83,40.61 229.83,43.21 227.99,45.05 226.52,45.05 R19.2
COL10  (via drill 0.5)
  Top 0.254: v223.2,34.1 224.56,32.74 IC2.31
  Bottom 0.254: R18.2 215.79,41.28 216.1,41.21 v223.2,34.1
COL11  (via drill 0.5)
  Top 0.254: IC2.32 224.06,32.48 223.2,33.34 v221.62,33.34
  Bottom 0.254: R17.2 197.25,34.71 200.21,31.75 213.37,31.75 214.31,30.8 218.36,30.8 220.9,33.34 v221.62,33.34
D+
  Top 0.152: IC1.4 73.55,23.13 73.03,22.61 58.42,22.61 51.69,29.34 3.81,29.34 3.68,29.34 3.18,29.34 3.18,103.51 5.72,106.05 R5.2
D+1  (via drill 0.5)
  Top 0.254: IC2.4 225.06,23.83 v223.97,22.73
  Bottom 0.254: R26.2 290.23,100.14 290.23,21.36 233.91,21.36 232.61,22.67 226.54,22.67 225.98,22.1 224.6,22.1 v223.97,22.73
D-
  Top 0.152: IC1.3 73.05,23.52 72.64,23.11 58.8,23.11 52.07,29.84 3.81,29.84 3.81,103.51 4.45,104.14 R4.2
D-1  (via drill 0.5)
  Top 0.254: IC2.3 224.59,25.07 224.59,24.71 221.79,21.91 v221.68,21.91
  Bottom 0.254: R25.2 291.72,102.78 291.72,20.76 233.78,20.76 232.42,22.13 226.77,22.13 226.27,21.63 221.95,21.63 v221.68,21.91
DFU
  Bottom 0.152: TP4.P$1 27.94,40.01 26.04,40.01 25.73,39.7 U1.24
FCTRYRST
  Bottom 0.254: TP3.P$1 28.27,31.45 U1.34
GND  (via drill 0.35)
  Top 0.152: v18.42,109.17 21.32,109.17 C6.2 24.27,112.09 29.17,112.09 29.48,112.4 30.21,112.4 32.75,109.86 v35.56,109.86 | v59.69,111.12 59.72,111.15 S3.3 61.07,111.17 64.83,111.17 66.05,112.4 66.79,112.4 67.68,111.51 D25.K 106.3,111.51 v114.3,103.51 v114.3,99.06 | C7.2 C2.2 66.93,28.16 v66.93,27.43 63.48,27.43 C14.2 | SW1.4 59.6,27.34 C9.2 61.03,28.77 C8.2 60.17,31.34 SW1.2 SW1.4 | 63.48,26.19 C14.2 | SW1.4 59.35,26.2 v59.25,26.1 59.56,26.42 C14.2 | v19.05,36.83 14.61,32.39 4.45,32.39 v4.45,102.87 | v68.9,25.84 69.25,26.19 IC1.43 71.42,26.19 71.76,26.53 71.76,29.84 71.7,29.9 71.7,29.91 71.42,30.19 IC1.35 | IC1.5 74.05,24.11 73.94,24 73.94,22.94 v74.17,22.71 | 78.37,27.19 IC1.15 | S1.3 40.7,111.12 v39.37,111.12
  Bottom 0.152: v59.69,111.12 59.61,111.21 49.61,111.21 v49.53,111.12 | v114.3,103.51 116.71,103.51 U4.$GND | v114.3,99.06 117.35,99.06 U4.GND | v59.25,26.1 33.08,26.1 31.12,24.13 29.85,24.13 28.13,25.85 U1.42 26.16,25.85 25.06,26.94 23.79,26.94 22.69,25.85 U1.1 U1.2 | U1.13 18.03,37.89 18.55,37.37 18.55,37.33 v19.05,36.83 v20.32,36.83 | v74.17,22.71 69.9,22.71 68.9,23.72 v68.9,25.84 68.52,25.84 v66.93,27.43 | v20.32,36.83 v24.13,36.83 v25.4,36.83 25.9,37.33 25.9,37.37 26.43,37.89 U1.25 | v20.32,36.83 20.13,37.02 U1.16 | v39.37,111.12 36.83,111.12 v35.56,109.86 | U3.2 99.44,20.57 v100.33,19.69 | X1.1 110.52,22.23 v107.32,22.23 | J1.EARTH 106.12,28.5 v106.05,28.58 | v4.45,102.87 v4.45,109.86 17.73,109.86 v18.42,109.17
  other vias: 79.76,27.69 79.76,25.79 90.68,29.84 17.78,24.77 19.05,24.77 22.23,26.54 26.67,24.77 22.23,30.48 22.23,32.39 22.23,34.92 19.05,35.56 25.4,35.56 19.05,26.04 15.88,27.3 15.88,24.77 28.58,24.77 17.15,38.73 27.31,38.73
  pour Bottom: 0,114.3 0,24.26 82.55,24.26 82.55,0 144.78,0 144.78,24.13 119.38,24.13 119.38,114.3
  pour Top (rank 2): 0,114.3 0,24.13 53.98,24.13 54.61,24.13 59.06,19.69 82.55,19.69 82.55,0 144.78,0 144.78,24.13 119.38,24.13 119.38,114.3
GND1  (via drill 0.35, 0.5)
  Top 0.152: IC2.5 225.56,23.63 224.65,22.72 224.65,22.45 223.15,20.96 220.35,20.96 220.35,25.4 221.52,26.58 IC2.43 | J4.5 280.64,108.56 280.04,107.95 278.13,107.95 276.86,109.22 276.86,112.4 276.55,112.71 274.32,112.71
  Top 0.254: Y2.2 234.56,28.32 v234.57,28.33 | v243.71,30.23 U$1.14 | v230.54,31.31 229.8,32.05 IC2.23 | v234.56,25.14 234.56,25.01 233.9,24.35 v233.9,22.86 | v234.61,26.74 234.26,26.74 234.01,26.49 231.67,26.49 230.59,27.58 IC2.15 | 274.32,112.71 274.19,112.58 C5.2 | v260.35,110.49 259.71,110.49 S4.3 | v232.41,110.49 232.41,110.62 D58.K | v250.19,110.49 249.55,110.49 S5.3 | v200.74,26.07 200.74,26.24 200.42,26.56 200.42,26.88 U5.2 199.63,27.67 199.63,27.99 194.6,33.02 v192.41,33.02 | v203.2,22.86 202.33,22.86 201.79,23.41 200.66,23.41 200.03,22.77 U6.2 | SW2.4 SW2.2 | IC2.35 221.96,30.58 v221.17,31.37 | v208.53,17.53 205.3,20.76 v205.3,20.96
  Bottom 0.254: v260.35,110.49 v250.19,110.49 247.42,110.49 246.68,111.22 243.54,111.22 242.8,110.49 v232.41,110.49 187.82,110.49 181.55,104.22 D47.C 179.71,101.66 179.71,43.12 J3.EARTH 189.81,33.02 v192.41,33.02 | C11.2 214.97,29.11 | C1.2 217.65,29.21 218.43,29.99 219.41,29.99 220.6,31.18 221.17,31.18 v221.17,31.37 | R24.1 208.5,17.57 v208.53,17.53
  other vias: 215.27,26.67
  pour Top (isolate 0.305): 176.53,114.3 176.53,24.13 151.13,24.13 151.13,0 213.36,0 213.36,18.41 295.91,18.41 295.91,114.3
  pour Bottom (isolate 0.305): 176.53,114.3 176.53,24.13 151.13,24.13 151.13,0 213.36,0 213.36,18.41 295.91,18.41 295.91,114.3
MISO  (via drill 0.35)
  Top 0.152: IC1.11 77.05,24.61 77.67,23.99 77.67,22.24 76.44,21.01 57.48,21.01 51.25,27.24 v19.69,27.24
  Bottom 0.152: v19.69,27.24 19.69,31.5 19.04,32.15 U1.5
MODE  (via drill 0.35)
  Top 0.152: v81.28,30.23 80.67,30.23 79.56,29.12 arc-45 78.55,28.7 IC1.18 | v87.31,28.58 U$7.13 | v80.65,36.2 80.65,38.8 63.06,38.8 63.06,107.12 61.34,108.84 50.21,108.84 S2.2
  Bottom 0.152: v80.65,36.2 81.28,35.56 v81.28,30.23 82.93,28.58 v87.31,28.58
MOSI  (via drill 0.35)
  Top 0.152: IC1.10 76.55,24.37 77.17,23.75 77.17,22.45 76.23,21.51 57.87,21.51 51.44,27.94 v20.96,27.94
  Bottom 0.152: v20.96,27.94 20.96,30.86 18.97,32.84 U1.6
N$1  (via drill 0.35)
  Top 0.152: R2.1 v71.76,107.95
  Bottom 0.152: v71.76,107.95 71.31,108.4 35.5,108.4 D26.K
N$2  (via drill 0.35)
  Top 0.152: IC1.33 71.73,31.99 71.72,31.99 71.35,32.36 v70.13,32.36 | v33.59,31.5 13.97,31.5 13.78,31.5 11.18,31.5 v10.8,31.12
  Bottom 0.152: v70.13,32.36 34.46,32.36 v33.59,31.5 | v10.8,31.12 R7.1
N$3  (via drill 0.35)
  Top 0.152: v115.57,93.98 112.4,97.16 112.4,102.23 106.68,107.95 R2.2 | v114.3,33.02 115.57,34.29 v115.57,42.8
  Bottom 0.152: v115.57,42.8 v115.57,93.98 | U3.1 101.64,22.81 101.98,22.81 102.67,23.5 108.59,23.5 114.3,29.21 v114.3,33.02
N$4  (via drill 0.35)
  Top 0.152: v100.33,25.4 99.7,24.77 96.31,24.77 R8.1
  Bottom 0.152: U3.5 100.39,25.34 v100.33,25.4
N$5
  Top 0.152: D25.A 70.55,107.38 70.61,107.31 71.25,106.68 87,106.68 87.63,106.05 R6.1
N$6
  Top 0.152: R5.1 12.7,106.05 13.97,107.31 J2.3
N$7
  Top 0.254: K1.P$2 14.61,97.15 15.2,96.55 15.2,93.95 14.61,93.35 K7.P$2 14.61,78.1 15.2,77.5 15.2,74.9 14.61,74.3 K13.P$2 14.61,59.05 15.2,58.45 15.2,55.85 14.61,55.25 K19.P$2
  Bottom 0.152: K19.P$2 16.51,43.18 20.96,47.62 29.85,47.62 38.1,39.37 R11.1
N$8
  Top 0.254: K2.P$2 33.66,100.96 34.25,100.36 34.25,97.76 33.66,97.16 K8.P$2 33.66,81.91 34.25,81.31 34.25,78.71 33.66,78.11 K14.P$2 33.66,62.86 34.25,62.26 34.25,59.66 33.66,59.06 K20.P$2
  Bottom 0.152: K20.P$2 37.89,46.99 R12.1
N$9
  Top 0.254: K3.P$2 52.71,103.5 53.3,102.9 53.3,100.3 52.71,99.7 K9.P$2 52.71,84.45 53.3,83.85 53.3,81.25 52.71,80.65 K15.P$2 52.71,65.4 53.3,64.8 53.3,62.2 52.71,61.6 K21.P$2
  Bottom 0.152: K21.P$2 55.03,47.2 R13.1
N$10
  Top 0.254: K4.P$2 71.76,100.96 72.35,100.36 72.35,97.76 71.76,97.16 K10.P$2 71.76,81.91 72.35,81.31 72.35,78.71 71.76,78.11 K16.P$2 71.76,62.86 72.35,62.26 72.35,59.66 71.76,59.06 K22.P$2 88.9,46.99 88.9,44.45 89.4,43.95 89.4,43.87 90.22,43.05 91.39,43.05 92.12,43.78 108.55,43.78 109.27,43.05 110.44,43.05 111.21,43.81 116.59,43.81 116.59,34.04 113.67,31.12 113.67,15.24 111.21,15.24 110.44,16.01 98.29,16.01 K25.P$2
  Bottom 0.152: K22.P$2 73.66,45.09 R14.1
N$11
  Top 0.152: S1.1 36.17,111.09 36.17,109.6 33.92,107.35 R9.2
N$12  (via drill 0.35)
  Top 0.152: v116.59,93.98 113.67,96.9 113.67,102.23 106.68,109.22 v71.76,109.22 | v96.52,29.21 93.98,31.75 v90.17,31.75 | v90.17,35.56 82.55,35.56 v82.55,45.72 | v111.13,66.04 v116.56,66.04 | v38.1,109.86 37.73,110.22 S1.2
  Bottom 0.152: v116.56,66.04 116.56,93.96 v116.59,93.98 | v71.76,109.22 38.74,109.22 v38.1,109.86 | U2.3 96.52,28.74 v96.52,29.21 | v90.17,31.75 v90.17,35.56 | v82.55,45.72 93.98,57.15 93.98,61.59 98.43,66.04 v111.13,66.04
N$13  (via drill 0.35)
  Top 0.254: K5.P$2 90.81,98.42 91.4,97.82 91.4,95.22 90.81,94.62 K11.P$2 90.81,79.37 91.4,78.77 91.4,76.17 90.81,75.57 K17.P$2 90.81,60.32 91.4,59.72 91.4,57.12 90.81,56.52 K23.P$2 v107.95,44.45
  Bottom 0.152: K23.P$2 83.19,44.45 80.23,41.49 R15.1
  Bottom 0.254: v107.95,44.45 108.45,43.95 108.45,43.87 110.46,41.87 117.41,41.87 117.41,33.49 117.06,33.49 116.04,32.47 116.04,31.03 117.06,30.01 117.48,30.01 117.48,18.41 K26.P$2
N$14
  Top 0.254: K6.P$2 109.86,98.42 110.45,97.82 110.45,95.22 109.86,94.62 K12.P$2 109.86,79.37 110.45,78.77 110.45,76.17 109.86,75.57 K18.P$2 109.86,60.32 112.4,57.78 112.4,46.99 K24.P$2 117.41,44.45 117.41,33.49 117.06,33.49 116.04,32.47 116.04,31.03 117.09,29.97 117.48,29.97 117.48,19.69 135.26,19.69 K27.P$2
  Bottom 0.152: K24.P$2 107.06,47.24 99.95,47.24 95.47,42.76 R16.1
N$15  (via drill 0.5)
  Top 0.152: J4.2 282.59,107.33 281.94,106.68 281.94,105.6 v282.58,104.97
  Bottom 0.254: v282.58,104.97 282.6,104.99 R25.1
N$16
  Top 0.152: R4.1 13.21,104.14 14.54,105.47 14.62,105.55 J2.2
N$17  (via drill 0.5)
  Top 0.254: U6.1 199.08,22.55 200.34,23.81 202.69,23.81 202.69,32.03 v203.58,32.92 | v202.95,37.91 201.3,39.56 201.3,110.49 229.24,110.49 231.64,108.08 248.87,108.08 250.91,106.05 262.66,106.05 265.05,108.43 R23.2
  Bottom 0.254: v202.95,37.91 203.58,37.27 v203.58,32.92
N$18
  Top 0.254: U6.5 198.12,23.84 198.12,20.96 203.93,20.96 203.93,25.09 R28.1
N$19  (via drill 0.5)
  Top 0.254: K28.P$2 191.14,98.42 191.73,97.82 191.73,95.22 191.14,94.62 K52.P$2 191.14,79.37 191.73,78.77 191.73,76.17 191.14,75.57 K32.P$2 191.14,60.32 191.73,59.72 191.73,57.12 191.14,56.52 K38.P$2 | v189.87,34.29 186.87,31.3 186.87,26.22 182.25,21.59 177.8,17.15 K45.P$2
  Bottom 0.254: K38.P$2 191.14,41.27 191.73,40.67 191.73,38.07 191.14,37.47 R17.1 189.87,35.14 v189.87,34.29
N$20  (via drill 0.5)
  Top 0.254: K39.P$2 210.19,98.42 210.78,97.82 210.78,95.22 210.19,94.62 K53.P$2 210.19,79.37 210.78,78.77 210.78,76.17 210.19,75.57 K33.P$2 210.19,60.32 210.78,59.72 210.78,57.12 210.19,56.52 K40.P$2 | K46.P$2 187.96,20.32 187.96,31.12 191.77,34.92 195.58,34.92 196.85,33.66 199.39,33.66 200.66,34.92 208.18,34.92 v208.28,34.83
  Bottom 0.254: K40.P$2 211.24,44.45 R18.1 211.27,41.25 211.27,38.51 208.28,35.53 v208.28,34.83
N$21  (via drill 0.5)
  Top 0.254: K48.P$2 229.24,100.96 229.83,100.36 229.83,97.76 229.24,97.16 K54.P$2 229.24,81.91 229.83,81.31 229.83,78.71 229.24,78.11 K34.P$2 229.24,62.86 229.83,62.26 229.83,59.66 229.24,59.06 K41.P$2 230.5,46.99 239.93,37.56 v242.32,37.56 | K47.P$2 191.77,17.15 188.6,20.32 188.6,30.48 192.41,34.29 194.95,34.29 196.22,33.02 200.03,33.02 201.1,34.09 209.85,34.09 210.68,34.92 241.96,34.92 v242.32,34.57
  Bottom 0.254: K41.P$2 226.28,46.99 R19.1 | v242.32,34.57 v242.32,37.56
N$22
  Top 0.254: K49.P$2 248.29,103.5 248.88,102.9 248.88,100.3 248.29,99.7 K29.P$2 248.29,84.45 248.88,83.85 248.88,81.25 248.29,80.65 K35.P$2 248.29,65.4 248.88,64.8 248.88,62.2 248.29,61.6 K42.P$2
  Bottom 0.254: K42.P$2 248.29,46.35 248.88,45.75 248.88,43.15 248.5,42.77 R20.1
N$23
  Bottom 0.254: K1.P$1 D1.A
N$24
  Bottom 0.254: K2.P$1 D2.A
N$25
  Bottom 0.254: K3.P$1 D3.A
N$26
  Top 0.152: K4.P$1 D4.A
N$27
  Bottom 0.254: K5.P$1 D5.A
N$28
  Bottom 0.254: K6.P$1 D6.A
N$29
  Bottom 0.254: K12.P$1 D12.A
N$30
  Bottom 0.254: K11.P$1 D11.A
N$31
  Bottom 0.152: K10.P$1 D10.A
N$32
  Bottom 0.254: K9.P$1 D9.A
N$33
  Bottom 0.254: K8.P$1 D8.A
N$34
  Bottom 0.254: K7.P$1 D7.A
N$35
  Top 0.254: K13.P$1 D13.A
N$36
  Top 0.254: K14.P$1 27.31,53.98 D14.A
N$37
  Top 0.254: D15.A 43.82,63.5 K15.P$1
N$38
  Bottom 0.152: D16.A 60.33,63.5 K16.P$1
N$39
  Top 0.254: D17.A 82.55,62.86 K17.P$1
N$40
  Bottom 0.254: K18.P$1 D18.A
N$41  (via drill 0.35)
  Top 0.152: v103.51,46.36 99.06,46.36 99.06,58.42 D24.A
  Bottom 0.152: K24.P$1 v103.51,46.36
N$42
  Top 0.254: D23.A 95.89,43.18 92.09,43.18 91.56,42.64 85.19,42.64 K23.P$1
N$43
  Top 0.254: K22.P$1 67.32,44.45 67.92,45.05 70.51,45.05 71.11,44.45 D22.A
N$44
  Top 0.254: K21.P$1 48.27,46.99 48.87,47.59 55.21,47.59 D21.A
N$45
  Top 0.254: D20.A 40.6,45.05 29.82,45.05 29.22,44.45 K20.P$1
N$46
  Top 0.254: K19.P$1 9.39,41.78 15.19,41.78 16.01,42.6 16.01,45.85 D19.A
N$47
  Top 0.254: K50.P$2 267.34,100.96 267.93,100.36 267.93,97.76 267.34,97.16 K30.P$2 267.34,81.91 267.93,81.31 267.93,78.71 267.34,78.11 K36.P$2 267.34,62.86 267.93,62.26 267.93,59.66 267.34,59.06 K43.P$2
  Bottom 0.254: K43.P$2 267.34,43.81 267.93,43.21 267.93,40.61 267.55,40.23 R21.1
N$48
  Top 0.254: K51.P$2 286.38,97.15 286.98,96.55 286.98,93.95 286.38,93.35 K31.P$2 286.38,78.1 286.98,77.5 286.98,74.9 286.38,74.3 K37.P$2 286.38,59.05 286.98,58.45 286.98,55.85 286.38,55.25 K44.P$2
  Bottom 0.254: K44.P$2 286.38,40 286.98,39.4 286.98,36.8 286.6,36.42 R22.1
N$49
  Bottom 0.254: K28.P$1 184.79,87.5 D27.A
N$50
  Bottom 0.254: K39.P$1 203.84,87.63 D41.A
N$51
  Bottom 0.254: K48.P$1 222.88,90.17 D48.A
N$52
  Bottom 0.254: K49.P$1 241.94,92.71 D52.A
N$53
  Bottom 0.254: K27.P$1 123.19,20.32 D33.A
N$54
  Bottom 0.254: D32.A 119.37,10.8 114.96,15.2 112.37,15.2 111.77,14.61 K26.P$1
N$55
  Bottom 0.254: D31.A 100.32,10.8 95.91,15.2 93.32,15.2 92.72,14.61 K25.P$1
N$56
  Bottom 0.254: K50.P$1 260.99,90.17 D53.A
N$57
  Bottom 0.254: K51.P$1 280.04,86.36 D54.A
N$58
  Bottom 0.254: K31.P$1 280.04,67.31 D30.A
N$59
  Bottom 0.254: K30.P$1 260.99,71.12 D29.A
N$60
  Bottom 0.254: K29.P$1 241.94,73.66 D28.A
N$61
  Bottom 0.254: K54.P$1 222.88,71.12 D57.A
N$62
  Bottom 0.254: K53.P$1 203.84,68.58 D56.A
N$63
  Bottom 0.254: K52.P$1 184.79,68.58 D55.A
N$64  (via drill 0.35)
  Top 0.152: v112.52,42.8 112.52,36.96 111.76,36.2 102.11,36.2 v101.6,35.69 | v90.81,28.58 92.08,27.3 92.08,24.77 90.17,22.86 86.36,22.86 84.46,24.77 U$7.5
  Bottom 0.152: v101.6,35.69 91.44,35.69 91.44,29.21 v90.81,28.58 | v112.52,42.8 112.52,99.57 114.43,101.47 U4.OUT
N$66
  Bottom 0.254: K32.P$1 184.79,49.53 D34.A
N$67
  Bottom 0.254: K33.P$1 203.84,49.53 D35.A
N$68
  Bottom 0.254: K34.P$1 222.88,52.07 D36.A
N$69
  Bottom 0.254: K35.P$1 241.94,54.61 D37.A
N$70
  Bottom 0.254: K36.P$1 260.99,52.07 D38.A
N$71
  Bottom 0.254: K37.P$1 280.04,48.26 D39.A
N$72
  Bottom 0.254: D46.A K44.P$1
N$73
  Bottom 0.254: D45.A K43.P$1
N$74
  Bottom 0.254: D44.A K42.P$1
N$75
  Top 0.254: D43.A 222.44,44.45 K41.P$1
N$76
  Bottom 0.254: D42.A 203.84,41.28 K40.P$1
N$77
  Bottom 0.254: K38.P$1 184.79,46.36 192.41,53.98 D40.A
N$78
  Top 0.254: D51.A 198.75,9.53 K47.P$1
N$79
  Top 0.254: D50.A 178.44,8.89 K46.P$1
N$80
  Bottom 0.254: K45.P$1 166.37,21.59 D49.A
N$81  (via drill 0.5)
  Top 0.254: U5.3 201.77,28.07 v201.77,32.89 | S4.2 255.91,111.01 255.91,107.12 251.59,107.12 249.87,108.84 232.16,108.84 229.74,111.25 200.41,111.25 200.41,38.93 v201.68,37.66
  Bottom 0.254: v201.77,32.89 201.77,37.56 v201.68,37.66
N$82  (via drill 0.35, 0.5)
  Top 0.254: v254.51,109.22 254.54,109.26 S4.1 | v272.35,109.6 270.85,109.6 R29.2
  Bottom 0.254: v254.51,109.22 259.91,109.22 263.15,105.98 270.76,105.98 272.35,107.57 v272.35,109.6
N$83
  Top 0.254: R27.1 236.09,111.25 D58.A
N$84
  Top 0.254: R23.1 267.06,110.13 D59.K
N$85  (via drill 0.35)
  Top 0.152: IC2.33 223.5,32.05 v222.92,32.64
  Bottom 0.152: v222.92,32.64 222.92,31.3 R30.1
N$86
  Bottom 0.254: R31.1 181.55,97.62 D47.A
N$87  (via drill 0.35)
  Top 0.152: U$1.6 234.95,23.88 234.95,20.96 244.53,20.96 244.53,31.01 244.48,31.01 244.48,35.56
  Top 0.254: 244.48,35.56 200.66,35.56 193.68,42.55 187.96,42.55 181.86,48.64 181.86,93.03 v181.8,93.09
  Bottom 0.254: v181.8,93.09 R31.2
N$88  (via drill 0.35)
  Top 0.152: J4.3 281.94,107.95 280.67,106.68 v280.67,103.51
  Bottom 0.152: v280.67,103.51 288.57,103.51 R26.1
ROW0
  Top 0.152: IC1.37 69.52,29.19 69.52,34.92 62.42,34.92 62.42,92.08 D3.C
  Bottom 0.254: D1.C 18.42,88.27 33.66,88.27 D2.C 35.56,90.17 52.07,90.17 D3.C 60.96,92.08 64.77,88.27 64.82,88.32 65.91,88.32 67.13,89.54 D4.C 80.19,89.54 83.95,85.78 85.04,85.78 85.09,85.72 90.81,85.72 D5.C 101.6,87 102.87,85.72 102.92,85.78 104.01,85.78 105.23,87 D6.C
ROW1
  Top 0.152: IC1.38 68.96,28.69 68.96,34.29 61.79,34.29 61.79,66.67 56.52,66.67 56.52,70.48 D9.C
  Bottom 0.254: D7.C 18.42,69.22 28.58,69.22 29.85,70.48 D8.C 35.61,71.17 41.15,71.17 41.73,71.75 52.71,71.75 D9.C 61.14,73.03 64.9,69.27 65.35,69.27 65.41,69.22 71.76,69.22 D10.C 80.01,70.48 83.82,66.67 90.81,66.67 D11.C 101.78,67.95 103,66.73 104.09,66.73 104.14,66.67 105.41,67.95 D12.C
ROW2  (via drill 0.35)
  Top 0.152: IC1.39 68.28,28.19 68.28,33.66 61.15,33.66 61.15,55.25 D16.C
  Top 0.254: D18.C 111.13,46.99 109.99,45.85 109.27,45.85 108.53,45.11 92.77,45.11 91.94,45.94 v91.66,45.94 | v89.95,45.94 89.54,46.36 89.54,48.39 80.65,48.39 80.65,53.34 D17.C v73.03,55.25 | D16.C 59.06,55.88 v53.36,55.88 | v52.05,55.88 D15.C 38.76,55.88 v34.31,51.44 | D14.C 26.49,51.44 25.27,50.22 24.26,50.22 22.81,51.67 22.81,51.94 22.1,52.65 20.9,52.65 D13.C
  Bottom 0.254: v91.66,45.94 v89.95,45.94 | v53.36,55.88 v52.05,55.88 | v34.31,51.44 D14.C | D16.C v73.03,55.25
ROW3  (via drill 0.35)
  Top 0.152: IC1.40 67.63,27.69 67.63,33.02 59.69,33.02 D21.C
  Top 0.254: D23.C 95.89,46.99 v91.46,46.99 | v88.88,47.65 78.97,47.65 v78.74,47.88 D22.C | D20.C 54.11,50.93 54.11,48.95 53.29,48.13 52.12,48.13 51.3,48.95 51.3,54.74 50.8,55.25 48.9,55.25 39.24,45.59 28.15,45.59 27.89,45.85 26.72,45.85 24.69,43.81 D19.C
  Bottom 0.152: v78.74,45.97 74.68,45.97 72.32,48.34 63.58,48.34 D21.C 57.15,46.99 D20.C
  Bottom 0.254: D24.C D23.C | v91.46,46.99 89.54,46.99 v88.88,47.65 | v78.74,47.88 v78.74,45.97
ROW4  (via drill 0.35)
  Top 0.152: v66.74,26.35 67.25,26.35 68.09,27.19 IC1.41
  Bottom 0.152: D31.C 98.34,8.98 93.34,8.98 88.9,13.42 88.9,20.96 66.74,20.96 v66.74,26.35
  Bottom 0.254: D33.C 123.19,12.52 124.41,11.3 124.41,10.29 123.19,9.07 D32.C D31.C
ROW5  (via drill 0.5)
  Top 0.254: IC2.37 221.15,29.58 v216.54,34.19 | v214.79,39.94 214.79,84.29 D41.C
  Bottom 0.254: D27.C 202.56,87 203.84,85.72 205.11,85.72 206.38,87 D41.C 228.6,87 D48.C 247.65,89.54 D52.C 254,88.27 267.97,88.27 D53.C 274.32,84.45 287.02,84.45 D54.C | v214.79,39.94 214.79,35.94 v216.54,34.19
ROW6  (via drill 0.5)
  Top 0.254: D42.C 198.12,40.01 201.93,36.2 211.07,36.2 | 211.07,36.2 217.11,36.2 D43.C 222,42.16 225.4,38.77 227.99,38.77 231.38,42.16 233.43,42.16 D44.C 238.76,36.83 D45.C 259.08,33.02 D46.C | v211.46,33.56 216.94,28.08 IC2.40 | v211.07,37.12 211.07,36.2
  Bottom 0.254: D40.C D42.C | v211.07,37.12 211.07,33.94 v211.46,33.56
ROW7  (via drill 0.5)
  Top 0.254: v214,34.19 219.61,28.58 IC2.39 | D35.C 212.34,48.64 v212.34,39.94
  Bottom 0.254: D34.C 202.67,48.89 203.89,47.68 204.98,47.68 206.19,48.89 211.91,48.89 D35.C 216.27,48.89 216.6,48.56 228.27,48.56 D36.C 247.65,51.44 D37.C 254,50.17 267.97,50.17 D38.C 274.32,46.36 287.02,46.36 D39.C | v212.34,39.94 212.34,35.84 v214,34.19
ROW8  (via drill 0.5)
  Top 0.254: IC2.38 220.38,29.08 v215.27,34.19 | v213.55,39.94 213.55,66.48 D56.C
  Bottom 0.254: D55.C 202.56,67.95 203.84,66.67 204.92,66.67 206.19,67.95 D56.C 228.6,67.95 D57.C 233.06,70.48 235.08,68.47 245.63,68.47 D28.C 254,69.22 267.97,69.22 D29.C 274.32,65.41 287.02,65.41 D30.C | v213.55,39.94 213.55,35.91 v215.27,34.19
ROW9  (via drill 0.5)
  Top 0.254: D49.C D50.C 172.72,4.9 171.5,3.68 171.5,2.67 172.22,1.96 176.57,1.96 185.41,10.8 D51.C 198.12,16.51 203.75,16.51 204.52,15.74 205.69,15.74 205.82,15.88 211.46,15.88 211.46,20.96 212.76,22.26 v215.33,22.26 | v219.25,22.26 219.3,22.31 219.3,27.58 IC2.41
  Bottom 0.254: v219.25,22.26 v215.33,22.26
RST  (via drill 0.35)
  Top 0.152: SW1.1 SW1.3 57.79,27.3 57.79,26.04 59.44,24.38 v69.72,24.38 | v80.65,24.77 79.8,24.77 78.37,26.19 IC1.13
  Bottom 0.152: v80.65,24.77 80.26,24.38 v69.72,24.38
RST1
  Top 0.254: IC2.13 229.63,26.48 230.05,26.48 231.13,25.4 233.05,25.4 233.05,20.13 218.56,20.13 SW2.3 SW2.1
RX  (via drill 0.35)
  Top 0.152: v90.81,26.04 U$7.11 85.92,26.04 85.92,30.67 83.57,33.02 80.14,33.02 79.38,32.26 79.38,30.39 78.81,29.83 arc-45 78.55,29.72 IC1.20
  Bottom 0.152: v90.81,26.04 92.71,27.94 92.71,34.29 107.32,34.29 108.61,32.99 109.63,32.99 110.16,33.52 113.88,33.52 115.35,35 J1.RING2
RX1  (via drill 0.5)
  Top 0.254: IC2.20 231.37,30.08 232.41,31.12 238.89,31.12 238.89,26.35 241.79,26.35 U$1.11 243.36,26.42 v243.74,26.04
  Bottom 0.254: J3.TIP 189.35,31.12 196.85,31.12 199.39,28.58 210.63,28.58 215.58,23.62 241.33,23.62 v243.74,26.04
SCK  (via drill 0.35)
  Top 0.152: IC1.9 76.05,24.2 76.67,23.57 76.67,22.66 76.02,22.01 58.13,22.01 51.44,28.7 v19.05,28.7
  Bottom 0.152: v19.05,28.7 19.05,31.12 18.72,31.45 U1.4
SIG_MODE  (via drill 0.35)
  Top 0.152: IC1.19 78.55,29.21 arc45 79.31,29.52 80.33,30.54 v80.33,31.75 | v79.38,36.2 76.52,36.2 74.93,37.78 v72.39,37.78 | v64.77,41.91 63.69,42.99 63.69,107.51 61.34,109.86 59.69,109.86 58.39,111.15 S3.2
  Bottom 0.152: v80.33,31.75 79.38,32.7 v79.38,36.2 | v72.39,37.78 68.9,37.78 v64.77,41.91
SIG_MODE1  (via drill 0.5)
  Top 0.254: IC2.19 230.31,29.58 v230.54,29.34 | U$1.13 v240.22,28.96 240.22,31.37 v243.46,34.61 | v243.52,37.66 243.52,42.24 238.69,47.07 v238.69,103.5 | v245.81,109.66 245.88,109.74 S5.2
  Bottom 0.254: v230.54,29.34 239.84,29.34 v240.22,28.96 | v243.46,34.61 243.52,34.67 v243.52,37.66 | v238.69,103.5 244.25,109.06 244.59,109.06 245.19,109.66 v245.81,109.66
SWCLK
  Bottom 0.254: U1.36 27.25,29.85 28.09,29.85 28.25,29.69 28.25,28.26 TP1.P$1
TX  (via drill 0.35)
  Top 0.152: v90.81,27.3 U$7.12 86.61,27.3 86.61,30.86 83.82,33.66 80.01,33.66 78.8,32.45 78.81,32.45 78.81,30.48 arc-45 78.12,30.2 IC1.21
  Bottom 0.152: v90.81,27.3 92.08,28.58 92.08,34.92 92.15,35 J1.TIP
TX1  (via drill 0.5)
  Top 0.254: IC2.21 230.85,30.58 232.03,31.75 239.46,31.75 239.46,27.69 U$1.12 243.36,27.69 v243.74,27.3
  Bottom 0.254: J3.RING2 179.71,28.53 179.71,30.48 182.72,33.49 185.85,33.49 187.6,31.75 197.08,31.75 199.72,29.11 210.92,29.11 215.94,24.09 240.53,24.09 v243.74,27.3
VBAT  (via drill 0.35)
  Top 0.152: R1.2 96.05,20.96 v97.16,20.96
  Bottom 0.152: X1.2 103.36,20.46 101.31,18.41 99.7,18.41 v97.16,20.96 97.89,20.96 U3.3 98.49,21.81 99.8,23.11 101.85,23.11 102.62,23.88 D$4.A C3.1
VBAT1  (via drill 0.5)
  Top 0.254: v201.93,22.23 201,22.23 U6.3
  Bottom 0.254: D$1.A C4.1 | C4.1 193.6,22.46 X2.2 | C4.1 197.49,21.27 200.98,21.27 v201.93,22.23 201.93,20.11 R10.2
VBUS  (via drill 0.35)
  Top 0.152: IC1.7 75.05,24.23 75.69,23.59 v75.69,22.73 | v104.78,21.59 99.7,21.59 v98.43,22.86 | v111.13,34.29 104.53,34.29 99.06,28.82 v99.06,25.4 | v106.68,46.36 106.68,53.34 97.79,62.23 97.79,104.78 87.63,104.78 86.36,106.05 66.68,106.05 v65.41,104.78 | J2.1 15.27,108.89 16.91,107.25 C6.1 23.14,109.05 R9.1 27.39,109.05 D26.A
  Bottom 0.152: v75.69,22.73 81.81,22.73 82.29,22.25 96.58,22.25 98.43,24.09 | 98.43,24.09 U3.4 99.06,24.73 v99.06,25.4 100.14,26.48 U2.1 | D$4.C 104.72,21.64 v104.78,21.59 | v98.43,22.86 98.43,24.09 | J1.RING1 113.07,34.89 | 113.07,34.89 112.47,34.29 v111.13,34.29 | v106.68,46.36 106.68,44.37 111.13,39.92 111.13,36.83 113.07,34.89 | D26.A 34.67,106.68 47.63,106.68 49.53,104.78 v65.41,104.78
VBUS1  (via drill 0.35, 0.5)
  Top 0.152: v283.21,106.49 283.21,109.46 J4.1
  Top 0.254: v196.22,27.3 199.05,27.3 U5.1 199.08,26.7 U6.4 200.98,25.18 v201.83,26.04 | v227.39,21.4 226.56,22.23 IC2.7 | v265.62,107.06 269.96,107.06 R29.1 271.25,107.51 C5.1 277.21,107.51 v278.08,106.63
  Bottom 0.152: v278.08,106.63 278.22,106.49 v283.21,106.49
  Bottom 0.254: J3.RING1 184.23,28.5 186.06,26.67 191.83,26.67 D$1.C 196.22,28.52 v196.22,27.3 | v201.83,26.04 206.79,21.08 227.08,21.08 v227.39,21.4 227.64,21.64 232.33,21.64 233.74,20.23 293.31,20.23 293.31,106.49 v283.21,106.49 | v265.62,107.06 263.14,109.54 D59.A
XTAL1
  Top 0.152: U$7.2 81.72,28.58 Y1.3 81.22,28.89 80.81,28.48 79.51,28.48 79.22,28.19 IC1.17
XTAL2
  Top 0.152: IC1.16 78.61,27.69 79.81,26.49 Y1.1 82.37,26.49 83.19,27.3 U$7.3
XTAL3
  Top 0.254: IC2.16 229.57,28.11 231.19,28.11 232.18,27.12 Y2.3 233.42,27.5 235.86,27.5 236.05,27.69 U$1.3
XTAL4
  Top 0.254: U$1.2 236.79,28.96 236.22,29.52 Y2.1 232.24,29.52 231.32,28.61 229.57,28.61 IC2.17

## Text on the board
bPlace: Designed by Eddie Tian / 2020/06 | Designed by Eddie Tian / 2020/06